# EAGLE board SpringReverbPanel2 (EAGLE 7.2.0)
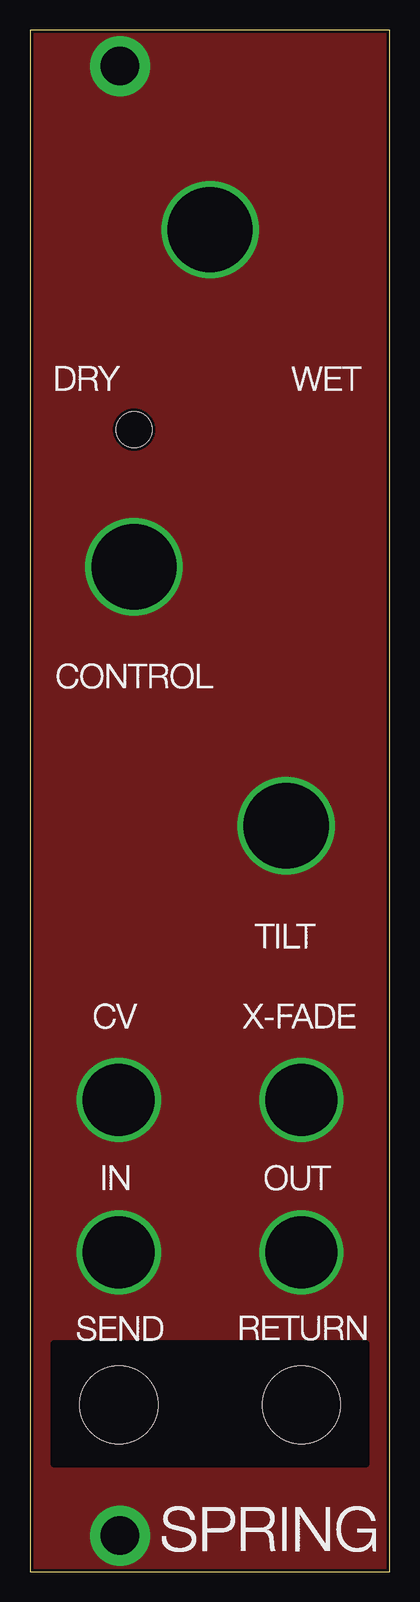
[diagram p0: board, top side]
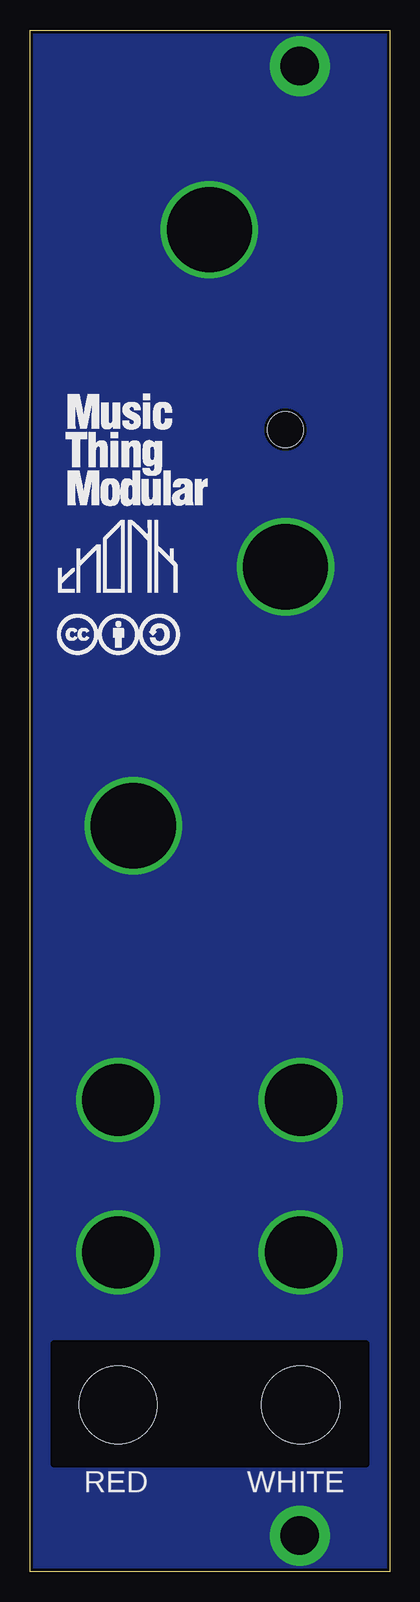
[diagram p1: board, bottom side, seen from below]

Size 30 x 128.5 mm. Coordinates in mm from the lower left corner, seen from the top.
Outline: 0,0 30,0 30,128.5 0,128.5 0,0
Copper layers (1*2*15*16): Top 0.035mm / dielectric 0.2mm / Route2 0.0175mm / dielectric 1.1mm / Route15 0.0175mm / dielectric 0.2mm / Bottom 0.035mm
Design rules "SeeedStudio_DRU_no_angle_20130527": minimum track width 6mil, minimum drill 12mil, track to track 6mil, track to pad 6mil, pad to pad 6mil, via to via 6mil, smd to smd 0mil, copper to edge 10mil, drill to drill 10mil, minimum pad ring 6mil, minimum via ring 6mil, stop-mask expansion 2mil, vias tented up to drill 25mil, thermal gap 10mil
Holes 3 mm at 8.68,95.18
Holes 6.5 mm at 7.41,13.9 22.65,13.9
tRestrict: area 2,9 to 28,19
bRestrict: area 2,9 to 28,19

## Placement (x,y rotation side)
U$1  [MTM_1CM_KEEPOUT]  17.98,78.68 0 top
U$2  [MTM_1CM]  27.1,88.37 0 bottom
U$3  [THONK_1CM_SCREENPRINT]  27.66,81.6 0 bottom
U$4  [CC_1CM_SCREENPRINT]  27.74,76.42 0 bottom

## Library data of the parts
U$1-U$4 = TW_logos

## Tracks (layer width: path | path; a pad name or v marks a point on that pad's centre or on a via)
GND  (via drill 3.2 pad 5, 6, 7.1)
  other vias: 7.5,3 7.5,125.5 22.65,39.3 7.41,39.3 22.65,26.6 7.41,26.6 21.38,62.16 8.68,83.75 15.03,111.85
  pour Bottom: -2.5,132 34.5,132 35.5,-5.5 -2.5,-4
  pour Top: -2.5,130.5 36.5,130.5 36.5,128.5 35,128.5 35,-2.5 -10.5,-2.5 -10.5,1 -4,1 -4,129.5

## Text on the board
bPlace: WHITE | RED